# EAGLE board Analog_3 (EAGLE 7.5.0)
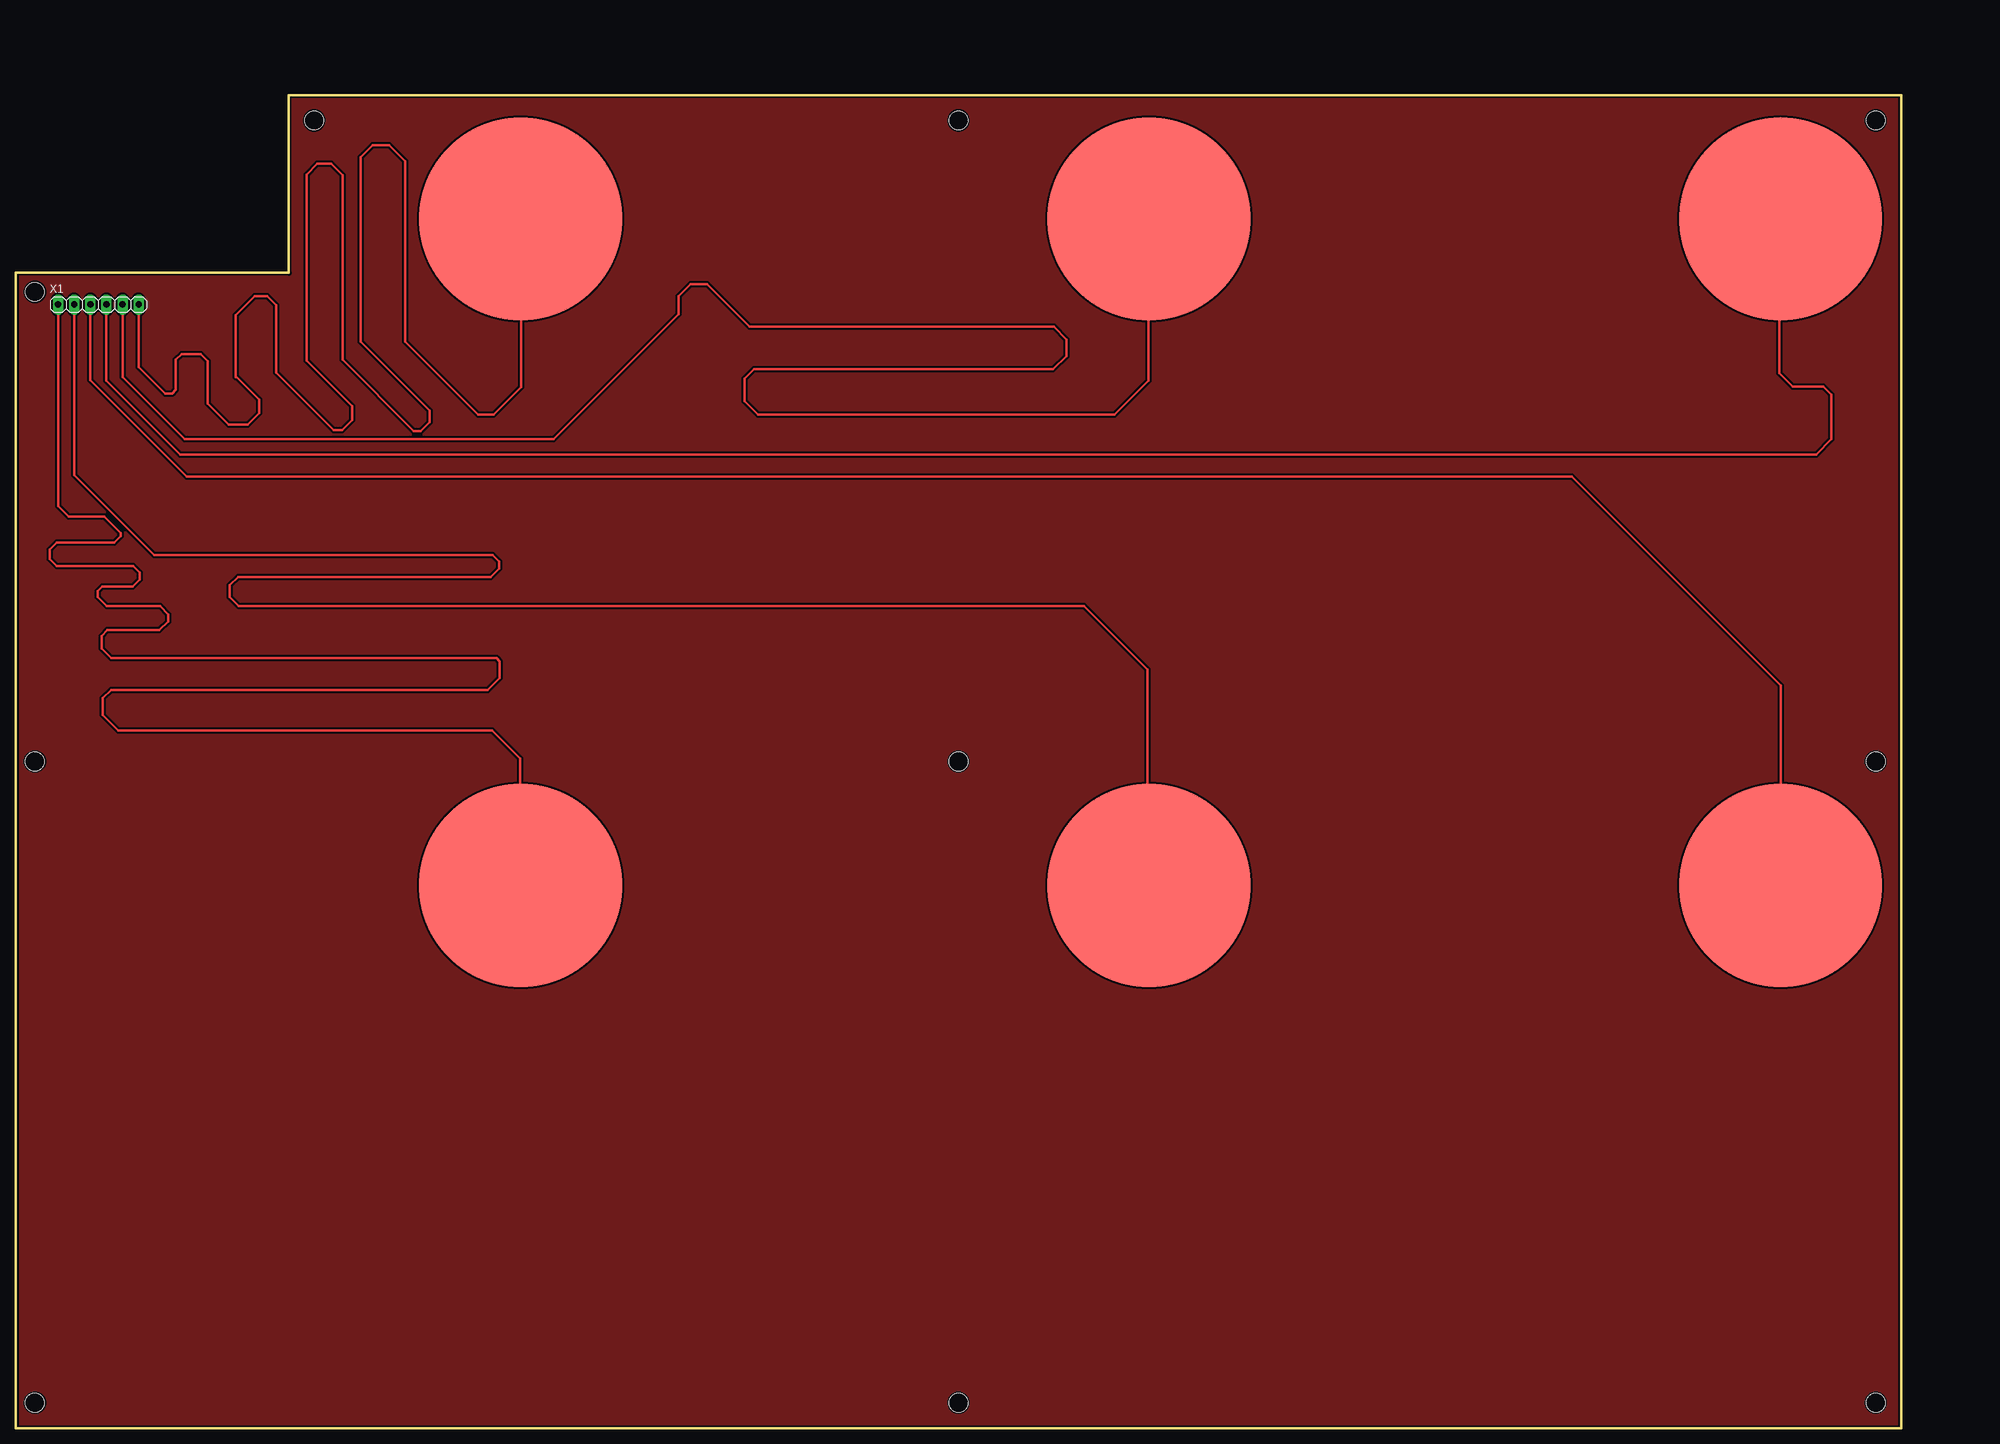
[diagram p0: board, top side]

Size 297 x 210 mm. Coordinates in mm from the lower left corner, seen from the top.
Outline: 297,0 297,210 43,210 43,182 0,182 0,0 297,0
Copper layers 16: Bottom 0.105mm
Design rules "eC_1Layer_PClass3_BaseCopperO105 *": minimum track width 0.25mm, minimum drill 0.35mm, track to track 0.3mm, track to pad 0.3mm, pad to pad 0.3mm, via to via 0.3mm, smd to smd 0mil, copper to edge 0.25mm, drill to drill 0.35mm, minimum pad ring 0.3mm, minimum via ring 0.3mm, stop-mask expansion 0mil, vias tented up to drill 0.45mm, thermal gap 0.2mm
Holes 3 mm at 293,206 293,4 3,4 3,179 47,206 293,105 3,105 148.5,4 148.5,206 148.5,105

## Footprints (pad centres in the part's own frame; a part is rotated, then mirrored left to right if it is on the bottom)
PAD = smd 32 x 32: P$1 0,0
1X06 = drill 1.016 long: 1 -6.35,0; 2 -3.81,0; 3 -1.27,0; 4 1.27,0; 5 3.81,0; 6 6.35,0

## Placement (x,y rotation side)
1  [PAD]  278,85.5 180 top
E$1  [PAD]  278,190.5 180 top
E$3  [PAD]  178.5,85.5 180 top
E$4  [PAD]  178.5,190.5 180 top
E$5  [PAD]  79.5,85.5 180 top
E$6  [PAD]  79.5,190.5 180 top
X1  [1X06]  13,177 0 top

## Library data of the parts
1 E$1 E$3-E$6 = pad
X1 = pinhead

## Nets
S$1: 1.P$1

## Tracks (layer width: path | path; a pad name or v marks a point on that pad's centre or on a via)
S$1
  Top 0.406: 1.P$1 278,117 245.1,149.9 26.9,149.9 11.72,165.08 11.72,177.04
S$2
  Top 0.406: 178.3,85.6 178.3,119.5 168.3,129.5 35.1,129.5 33.7,130.9 33.7,132.8 35,134.1 74.8,134.1 76.1,135.4 76.1,136.5 75.1,137.5 21.8,137.5 9.2,150.1 9.2,177
S$3
  Top 0.406: 79.4,85.6 79.4,105.5 75,109.9 16.1,109.9 13.7,112.3 13.7,115 15,116.3 74.3,116.3 76.2,118.2 76.2,120.8 75.7,121.3 15,121.3 13.5,122.8 13.5,124.8 14.4,125.7 22.6,125.7 24,127.1 24,128.2 22.7,129.5 14.3,129.5 12.9,130.9 12.9,131.9 13.6,132.6 18.4,132.6 19.5,133.7 19.5,134.8 18.5,135.8 6.4,135.8 5.3,136.9 5.3,138.4 6.4,139.5 15.5,139.5 16.5,140.5 16.5,141 13.9,143.6 8.3,143.6 6.67,145.23 6.67,177.01
S$4
  Top 0.406: 178.4,190.5 178.4,165 173.1,159.7 116.9,159.7 114.8,161.8 114.8,165.3 116.3,166.8 163.4,166.8 165.5,168.9 165.5,171.5 163.5,173.5 115.6,173.5 108.9,180.2 106.3,180.2 104.4,178.3 104.4,175.5 84.7,155.8 26.6,155.8 16.8,165.6 16.8,177
S$5
  Top 0.406: 277.8,189.5 277.8,166.2 279.9,164.1 284.7,164.1 286,162.8 286,155.8 283.6,153.4 25.9,153.4 14.25,165.05 14.25,176.99
S$6
  Top 0.406: 79.6,190.6 79.6,164 75.3,159.7 72.8,159.7 61.3,171.2 61.3,199.6 58.8,202.1 56.2,202.1 54.3,200.2 54.3,171.2 65.2,160.3 65.2,158.5 63.8,157.1 62.7,157.1 51.5,168.3 51.5,197.4 49.7,199.2 47.5,199.2 45.8,197.5 45.8,168.2 53,161 53,158.8 51.4,157.2 50.1,157.2 41,166.3 41,176.9 39.6,178.3 37.6,178.3 34.6,175.3 34.6,165.7 | 34.6,165.7 34.6,165.6 | 34.6,165.7 38.3,162 38.3,159.9 36.5,158.1 33.5,158.1 30.2,161.4 30.2,168.1 29.1,169.2 26.1,169.2 25.2,168.3 25.2,163.6 24.6,163 23.5,163 19.35,167.15 19.35,177.03
S$7
  pour Top: 297,210 43,210 43,182 0,182 0,0 297,0